# Altium PCB PCB_Power.PcbDoc
Units mil, origin at the board's own origin, x right, y up, seen from the top; angles counter-clockwise.
Board outline 6000 x 4000 mil, 2 copper layers (Top Layer, Bottom Layer); 9 components, 4 nets, 22 pads, 0 vias.
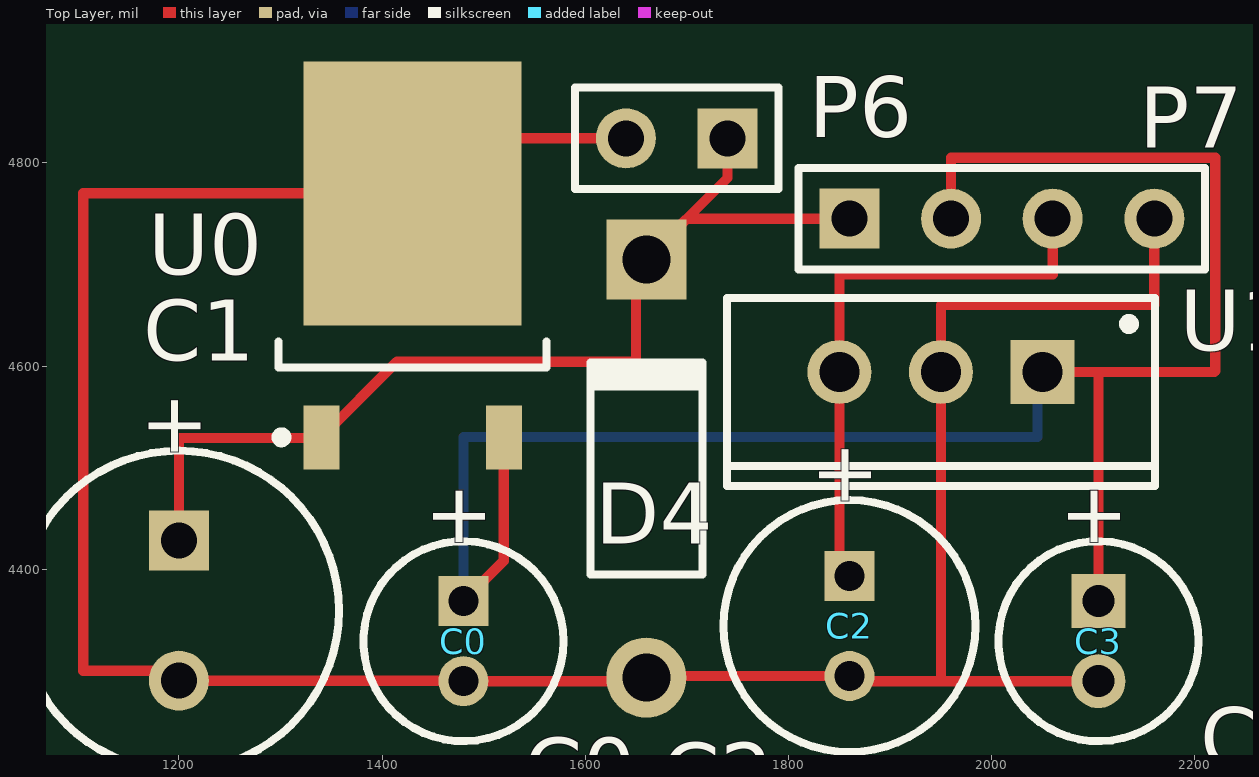
[diagram p0: Top Layer view]
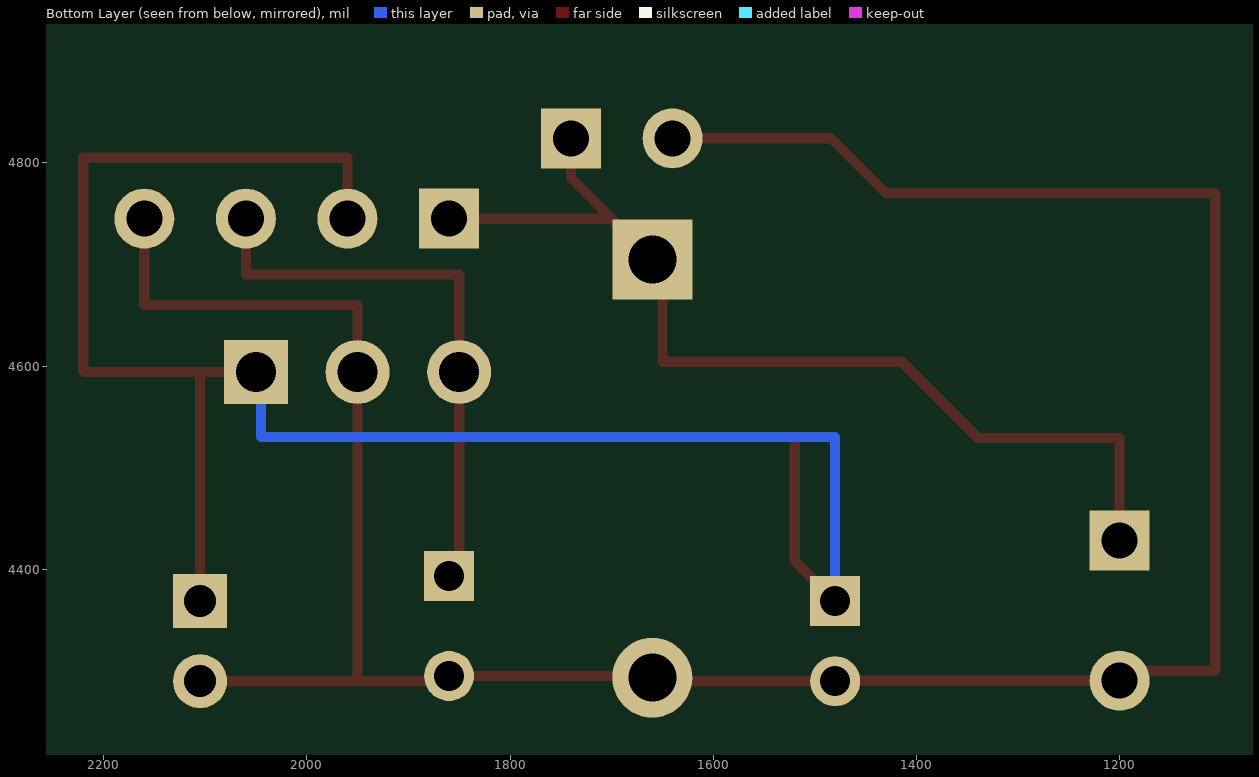
[diagram p1: Bottom Layer view, seen from below]

## Layer stack, top to bottom
Top Solder: solder mask 0.4, Solder Resist, Dk 3.5
Top Layer: signal copper 1.4
Dielectric 1: dielectric 12.6, FR-4, Dk 4.8
Bottom Layer: signal copper 1.4
Bottom Solder: solder mask 0.4, Solder Resist, Dk 3.5

## Board outline
1000,1000 7000,1000 7000,5000 1000,5000

## Design rules (kind name [scope] priority, off if disabled: settings)
Clearance [All] p1: gap=10
PolygonConnect [All] p1: connectstyle=Relief reliefconductorwidth=10 reliefentries=4 polygonreliefangle="90 Angle" airgapwidth=10
RoomDefinition SheetPower [InComponentClass('SheetPower')] p1: confinementstyle=ConfineIn formatcopy=TRUE lockcomponents=FALSE outline 1005,4139.13 2405,4139.13 2405,5000 1005,5000
RoutingVias [All] p1: holewidth=28 width=50 viastyle="Through Hole" minholewidth=28 minwidth=50 maxholewidth=28 maxwidth=50
SolderMaskExpansion [All] p1: expansion=4
Width [All] p1: maxlimit=10 minlimit=10 preferedwidth=10
29 further rules are at their usual default settings.

## Components (designator, comment, footprint, x,y, rotation, side; value= is the part's Value field where it differs from the comment)
C0 "94SC106X0010BBP" B 1480,4329.13 r270 top
C1 "94SA107X0010EBP" E 1200,4359.13 r270 top
C2 "94SA336X0010CBP" C 1860,4344.13 r270 top
C3 "EKE00AA047L00" CAPPR2-5X11 2105,4329.13 r270 top
D4 "Diode 1N4007" DO-41 1660,4499.13 r90 top
P6 "Header 2" HDR1X2 1740,4824.13 r180 top
P7 "Header 4" HDR1X4 1860,4745 r0 top
U0 "LM78M05CDT" TD03B_L 1430,4699.13 r90 top
U1 "LM3940IT-3.3" T03B 1950,4594.13 r180 top

## Footprints (in the part's own frame and the unit in brackets; to place one, negate y for a bottom-side part, rotate by r counter-clockwise, add the part's x,y. Pads: shape width x height; smd on the part's side, far side on the other; paste and mask are expansions set on the pad)
B [mm] "Capacitor, Electrolytic, Radial; Body 5 x 6.8 mm (Dia.xH typ); Pin Spacing 2 mm (typ)"
  rect 1.25x1.25 hole 0.75: 1(-1,0)
  round 1.25 hole 0.75: 2(1,0)
  silkscreen extent -2.5,-2.5 2.5,2.5
C [mm] "Capacitor, Electrolytic, Radial; Body 6.3 x 6.8 mm (Dia.xH typ); Pin Spacing 2.5 mm (typ)"
  rect 1.25x1.25 hole 0.75: 1(-1.25,0)
  round 1.25 hole 0.75: 2(1.25,0)
  silkscreen extent -3.15,-3.15 3.15,3.15
CAPPR2-5X11 [mm] "Capacitor, Electrolytic, Radial; Body 5 x 11 mm (Dia.xH typ); Pin Spacing 2 mm (typ)"
  rect 1.35x1.35 hole 0.8: 1(-1,0)
  round 1.35 hole 0.8: 2(1,0)
  silkscreen extent -2.5,-2.5 2.5,2.5
DO-41 [mm] "Diode, Axial; Body 5.2 x 2.7 mm (LxDia. max), Lead Dia. 0.86 mm (max)"
  round 2 hole 1.2: 1(-5.23,0)
  rect 2x2 hole 1.2: 2(5.23,0)
  silkscreen extent -2.65,-1.41 2.75,1.4
E [mm] "Capacitor, Electrolytic, Radial; Body 8 x 10.5 mm (Dia.xH typ); Pin Spacing 3.5 mm (typ)"
  rect 1.5x1.5 hole 0.9: 1(-1.75,0)
  round 1.5 hole 0.9: 2(1.75,0)
  silkscreen extent -4,-4 4,4
HDR1X2 [mm] "Connector; Header; 2 Position"
  rect 1.5x1.5 hole 0.9: 1(0,0)
  round 1.5 hole 0.9: 2(2.54,0)
  silkscreen extent -1.27,-1.27 3.81,1.27
HDR1X4 [mm] "Connector; Header; 4 Position"
  rect 1.5x1.5 hole 0.9: 1(0,0)
  round 1.5 hole 0.9: 2(2.54,0) 3(5.08,0) 4(7.62,0)
  silkscreen extent -1.27,-1.27 8.89,1.27
T03B [mm] "TO, Thru-Hole, Vertical, Heatsink Mounted; 3 In-Line Leads; Pitch 2.54 mm"
  rect 1.6x1.6 hole 1: 1(-2.54,0)
  round 1.6 hole 1: 2(0,0) 3(2.54,0)
  silkscreen extent -5.35,-1.85 5.35,2.85, body extent -5.4,-1.9 5.4,2.9, height 19.4
TD03B_L [mm] "D-PAK, 4-Leads, Body 6.1x6.6mm, Pitch 2.29mm, Lead Span 9.7mm, IPC High Density"
  rect 1.6x0.9 smd: 1(-4.3,2.28) 3(-4.3,-2.28)
  rect 6.6x5.45 smd: 4(1.8,0)
  silkscreen extent -4.42,-3.35 -1.9,3.4, body extent -2.55,-3.35 3.65,3.35, height 2.38

## Part data
C0: "Solid Aluminum Capacitor with Organic Semiconductor Electrolyte: 10uF, 10V, Bulk Pack"
C1: "Solid Aluminum Capacitor with Organic Semiconductor Electrolyte: 100uF, 10V, Bulk Pack"
C2: "Solid Aluminum Capacitor with Organic Semiconductor Electrolyte: 33uF, 10V, Bulk Pack"
C3: "Aluminum Electrolytic Capacitor, Radial Style with Long Leads: 470000pF, 100V"
D4: "1 Amp General Purpose Rectifier"
P6: "Header, 2-Pin"
P7: "Header, 4-Pin"
U0: "3-Terminal Positive Voltage Regulators, 3-pin TO-252"
U1: "1A Low Dropout Regulator for 5V to 3.3V Conversion, 3-pin TO-220"

## Nets (pads, with @x,y where several pads share a name; then routed paths per layer and width w, separated by ;. In a path a pad name is that pad's centre, name@x,y a point inside that pad or via, vN(x,y) a via of type N, cw(c..) or ccw(c..) an arc to the next point about the centre after c; other vN are vias at no path point)
GND: C0.2 C1.2 C2.2 C3.2 D4.1 P6.2 P7.4 U0.4 U1.2 | length 2689.1
  Top Layer w10: C0.2@1479.53,4290.24 C1.2 1190.24,4300 1105.87,4300 1105.87,4770 U0.4 1484.13,4824.13 P6.2 ; C0.2 1656.54,4289.76 D4.1 ; D4.1@1661.69,4294.92 C2.2 ; C2.2@1865.16,4289.76 1950,4289.76 ; C3.2 1950,4289.76 ; P7.4 2160,4660 1950,4660 U1.2 1950,4289.76
VCC: C0.1 C3.1 P7.2 U0.3 U1.1 | length 1889.4
  Top Layer w10: C0.1 1519.76,4408.27 U0.3 ; P7.2 1960,4805 2220,4805 2220,4595 2219.13,4594.13 2105,4594.13 ; U1.1 2105,4594.13 ; C3.1 2105,4594.13
  Bottom Layer w10: C0.1 1480,4530 2045,4530 U1.1@2045,4589.13
"VCC 3V3": C2.1 P7.3 U1.3 | length 565.8
  Top Layer w10: C2.1 1850,4403.35 U1.3 1850,4690 2060,4690 P7.3
"VCC 9V": C1.1 D4.2 P6.1 P7.1 U0.1 | length 999.4
  Top Layer w10: C1.1 1200,4529.13 1339.53,4529.13 U0.1 1414.53,4604.13 1650,4604.13 1650,4695.04 D4.2 1740,4785.04 P6.1 ; 1700.04,4745 P7.1

## Text inside footprints (layer, text, board x,y; h text height)
C0: Top Overlay "+" at 1450.47,4485.63 h59.06 r270
C1: Top Overlay "+" at 1170.47,4574.69 h59.06 r270
C2: Top Overlay "+" at 1830.47,4526.22 h59.06 r270
C3: Top Overlay "+" at 2075.47,4485.63 h59.05 r270